# Altium PCB TheRealMainboardPCB.PcbDoc
Units mil, origin at the board's own origin, x right, y up, seen from the top; angles counter-clockwise.
Board outline 3740.16 x 3740.16 mil, 2 copper layers (Top Layer, Bottom Layer); 30 components, 40 nets, 162 pads, 83 vias.
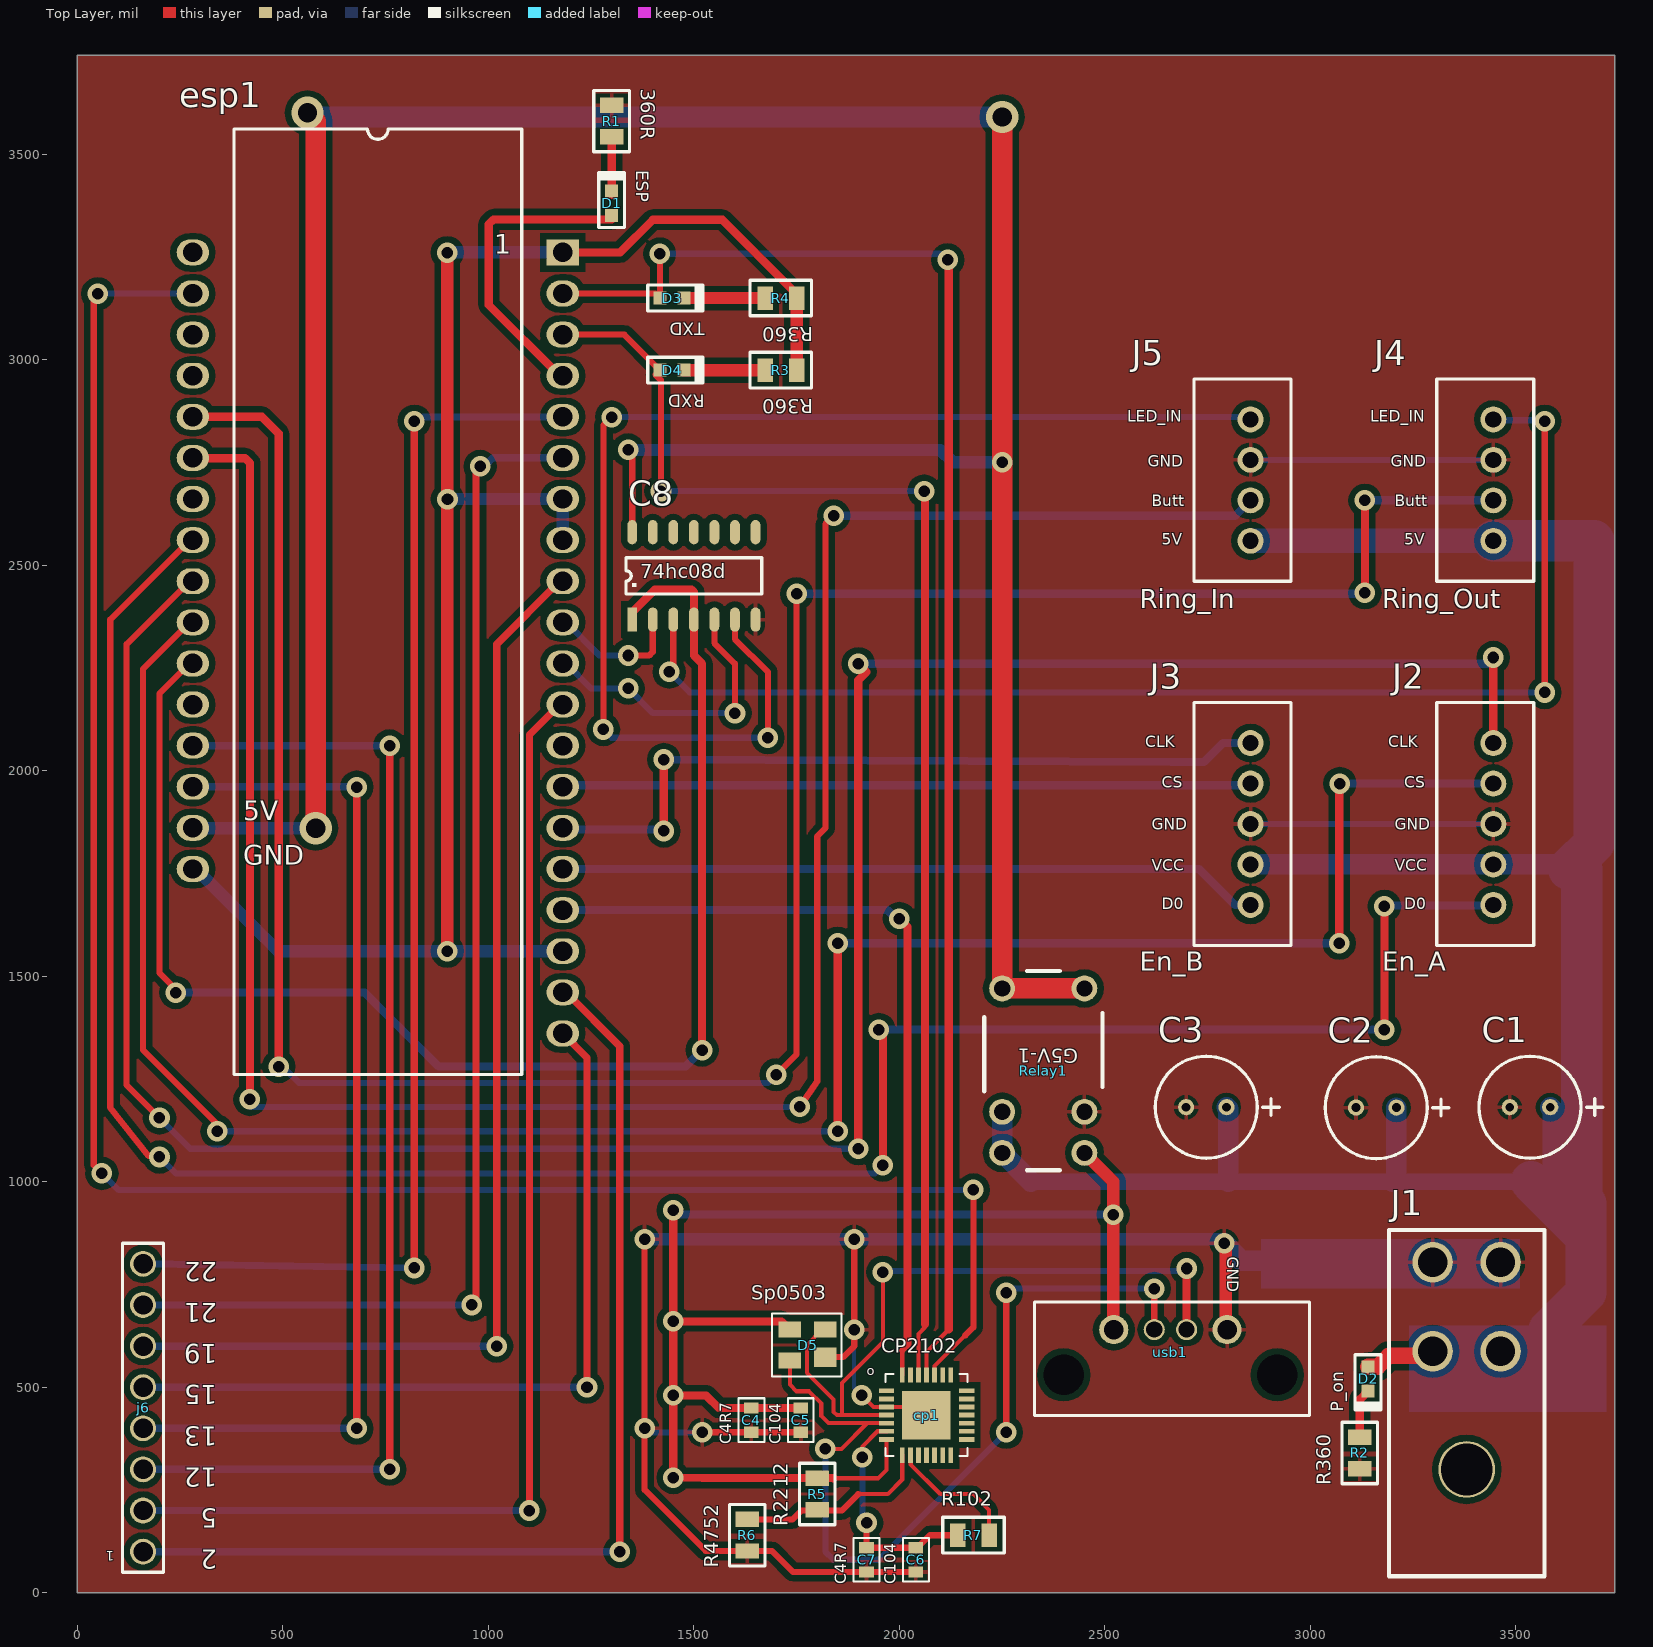
[diagram p0: Top Layer view]
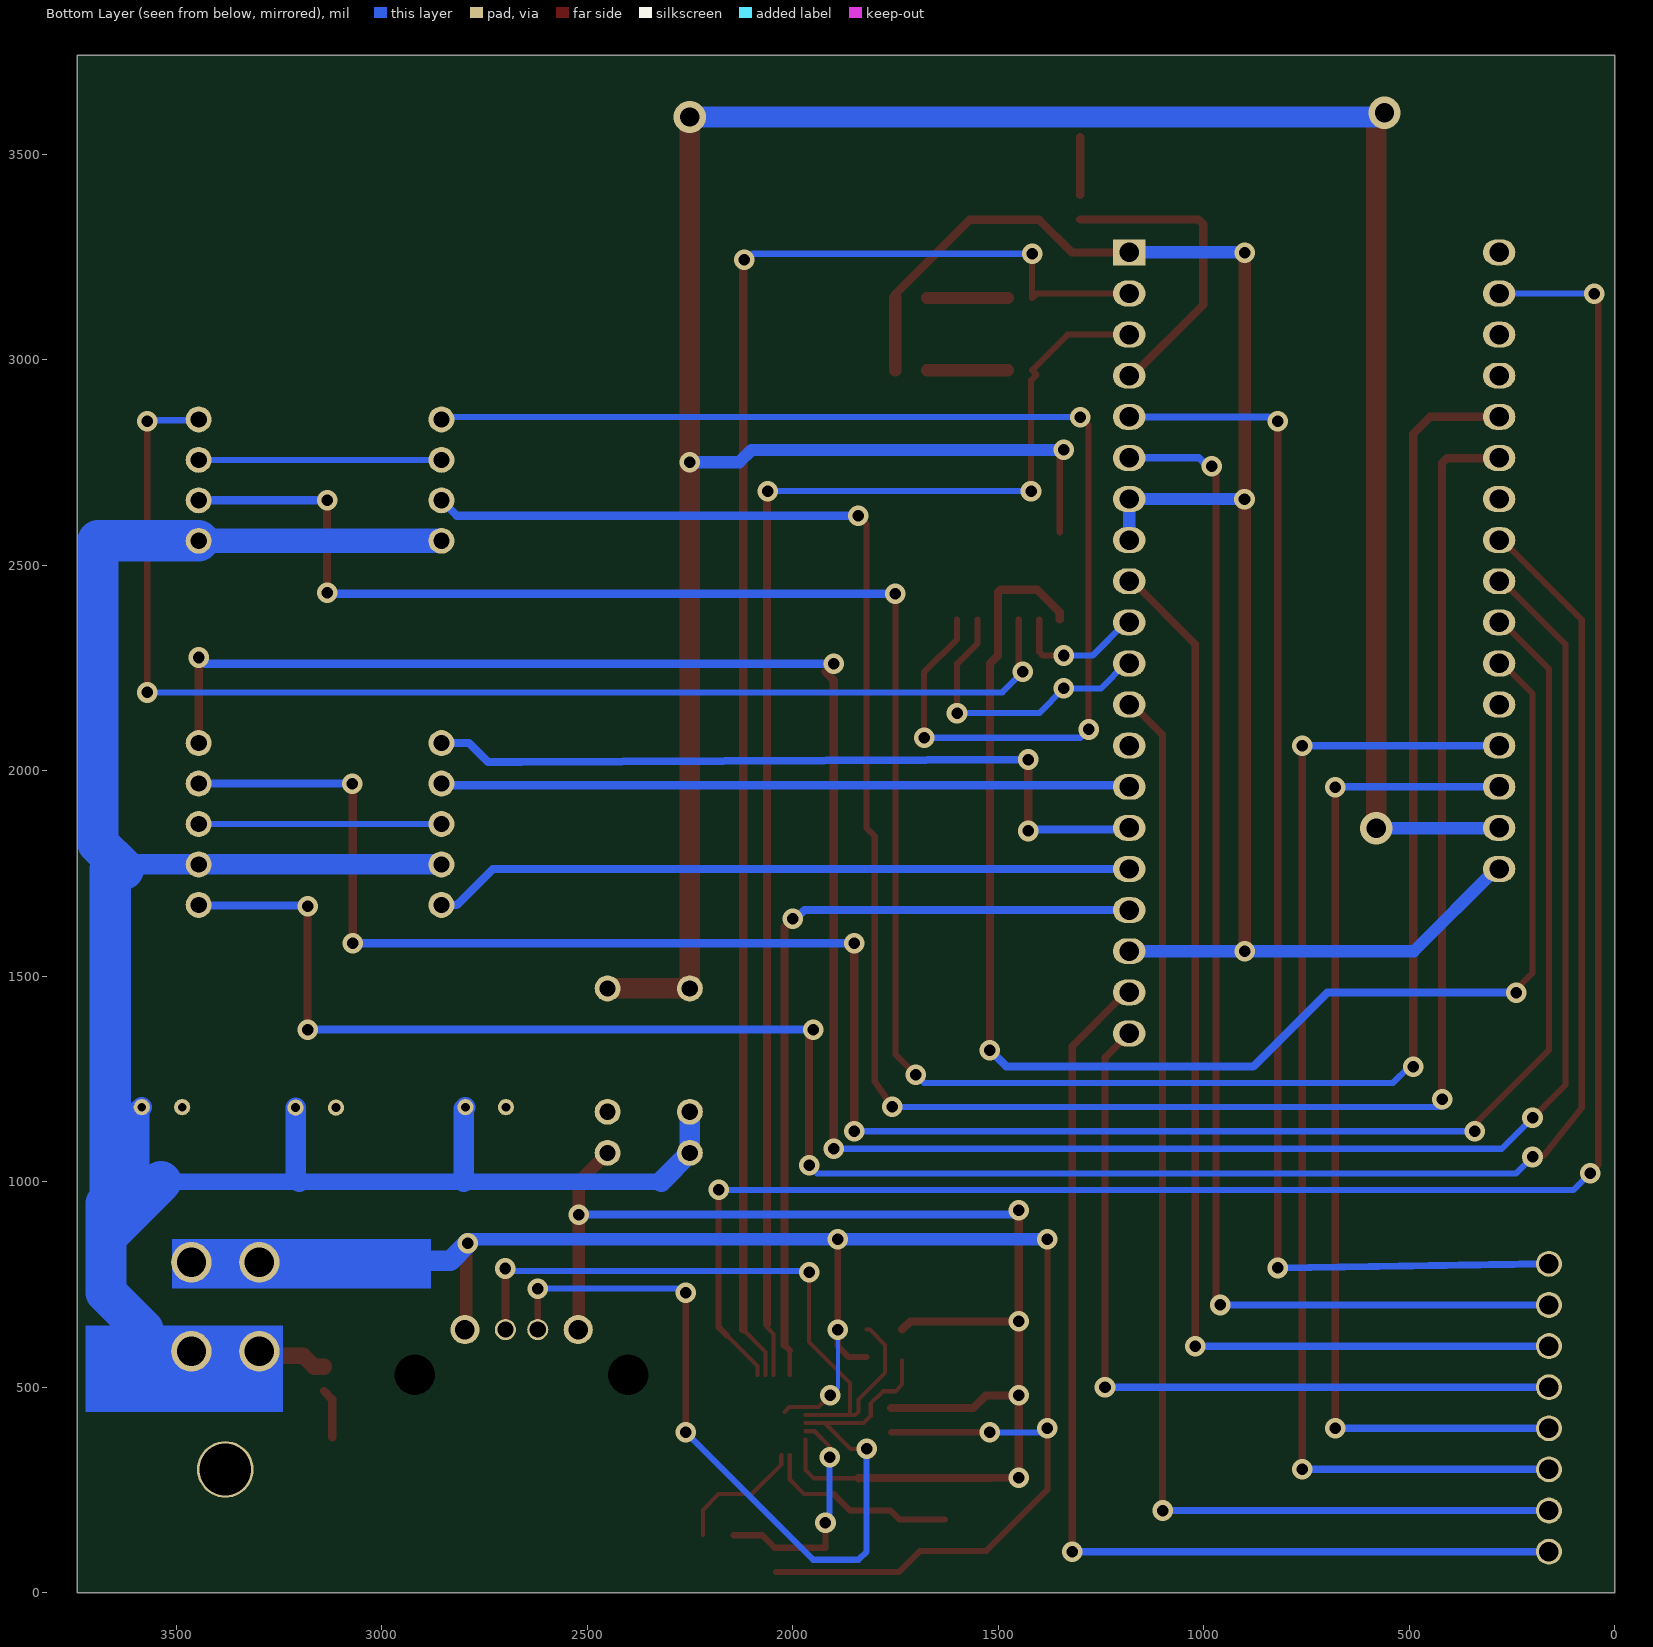
[diagram p1: Bottom Layer view, seen from below]
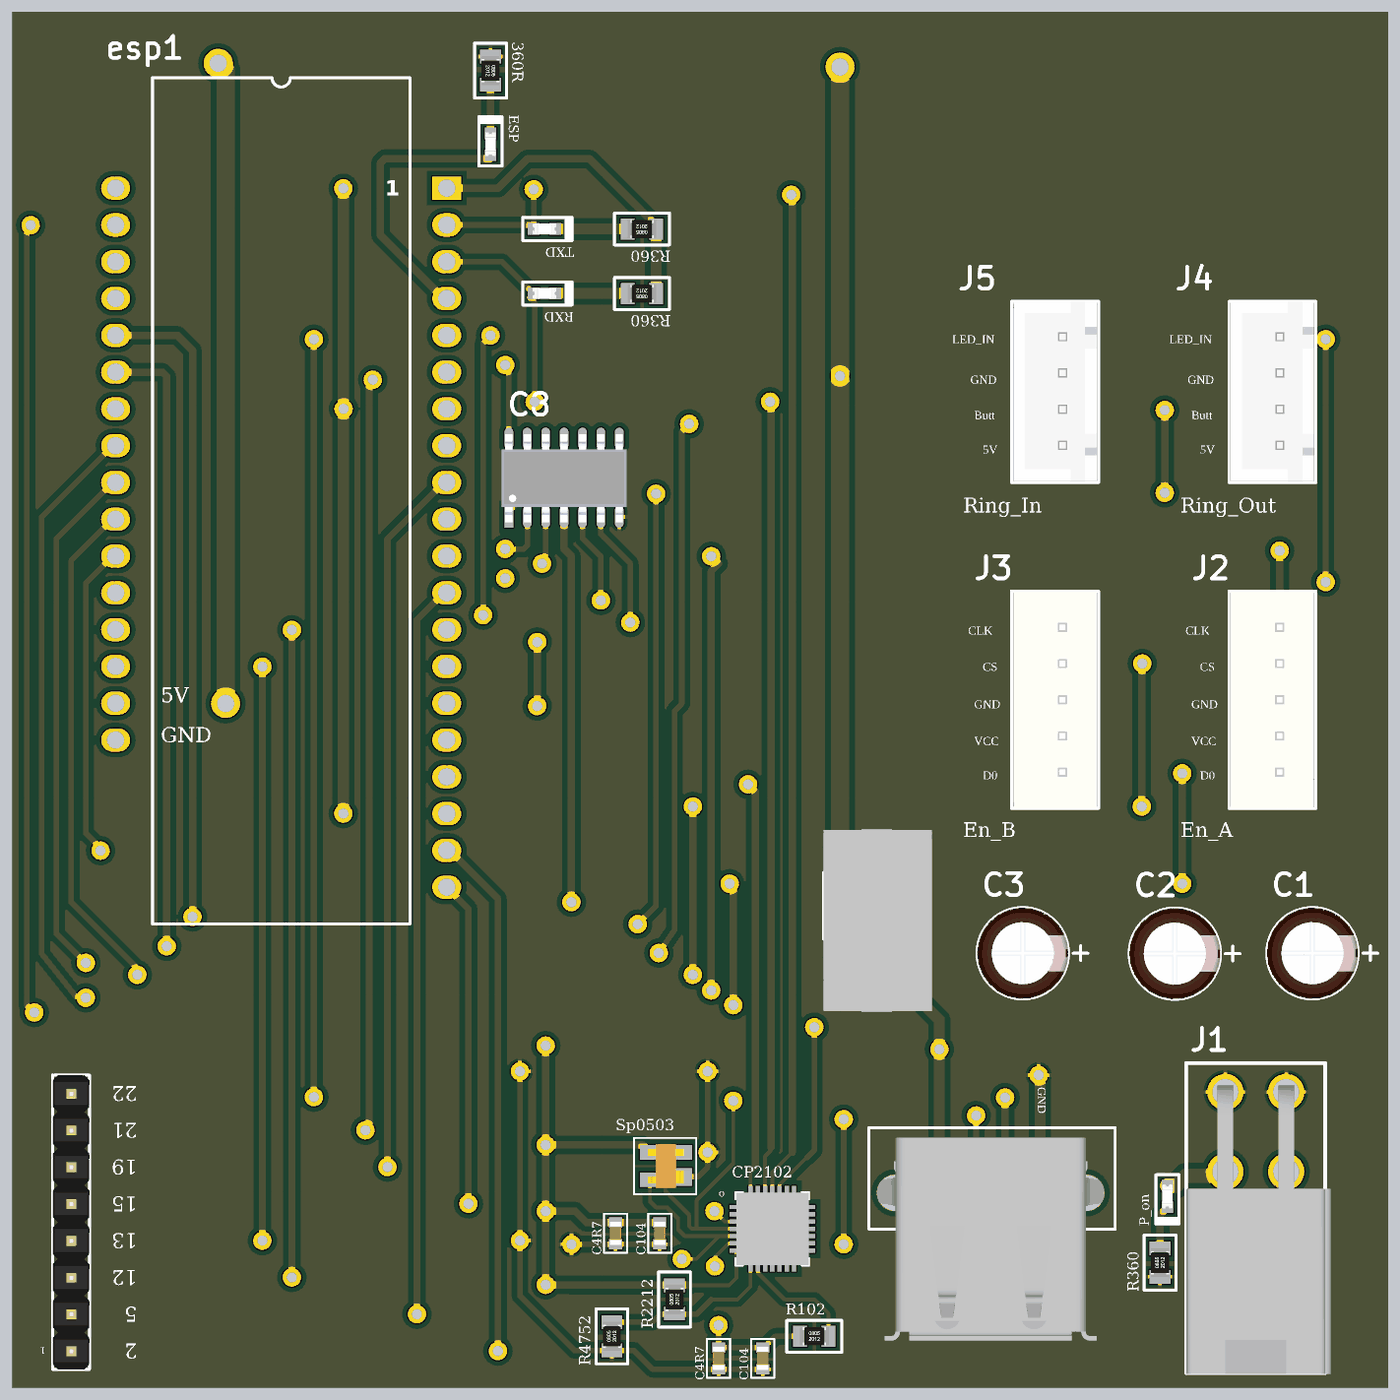
[diagram p2: 3D render of the assembled board from above, using the file's embedded part models]

## Layer stack, top to bottom
Top Solder: solder mask 0.4, Solder Resist, Dk 3.5
Top Layer: signal copper 1.4
Dielectric 1: dielectric 12.6, FR-4, Dk 4.8
Bottom Layer: signal copper 1.4
Bottom Solder: solder mask 0.4, Solder Resist, Dk 3.5

## Board outline
0,0 3740.16,0 3740.16,3740.16 0,3740.16

## Design rules (kind name [scope] priority, off if disabled: settings)
Clearance [All] p1: gap=15 ignorepadtopadclearanceinfootprint=FALSE except(5: Arc-THPad Arc-Text Arc-Hole Track-THPad Track-Text Track-Hole SMDPad-SMDPad SMDPad-THPad SMDPad-Via SMDPad-Text SMDPad-Hole THPad-THPad THPad-Via THPad-Text THPad-Hole Via-Via Via-Text Via-Hole Fill-Text Fill-Hole Poly-Text Poly-Hole Region-Text Region-Hole Text-Text Text-Hole; 7: Arc-SMDPad Track-SMDPad; 9: Arc-Arc Arc-Track Track-Track; 10: Arc-Via Track-Via)
HoleSize [All] p1: absolutevalues=TRUE maxlimit=196.85 minlimit=1 maxpercent=80.000 minpercent=20.000
MinimumSolderMaskSliver [All] p1: minsoldermaskwidth=0
PolygonConnect [All] p1: connectstyle=Relief reliefconductorwidth=10 reliefentries=4 polygonreliefangle="90 Angle" airgapwidth=10
RoutingVias [All] p1: holewidth=11.81 width=19.68 viastyle="Through Hole" minholewidth=11.81 minwidth=19.68 maxholewidth=47.24 maxwidth=78.74
SilkToSilkClearance [All] p1: silktosilkclearance=5
SilkToSolderMaskClearance [IsPad] p1: minsilkscreentomaskgap=5 clearancetoexposedcopper=TRUE
SolderMaskExpansion [All] p1: expansion=4
Width [All] p1: maxlimit=100 minlimit=5 preferedwidth=10
26 further rules are at their usual default settings.

## Components (designator, comment, footprint, x,y, rotation, side; value= is the part's Value field where it differs from the comment)
C1 "EEU-FM0J331" 2.5mmCapacitor 3534.09,1181.1 r0 top
C2 "EEU-FM0J331" 2.5mmCapacitor 3160,1180 r0 top
C3 "EEU-FM0J331" 2.5mmCapacitor 2746.69,1181.1 r0 top
C4 "C4R7" Capacitor0603 1640,420 r90 top
C5 "C104" Capacitor0603 1760,420 r90 top
C6 "C104" Capacitor0603 2040,80 r90 top
C7 "C4R7" Capacitor0603 1920,80 r90 top
C8 "74hc08d" SOP14(74hc08d) 1350,2367.4 r90 top
cp1 "CP2102N" CP2102N_QFN28 2065.94,432.13 r0 top
D1 "ESP" LED0603 1300,3380 r270 top
D2 "P_on" LED0603 3140,520 r90 top
D3 "TXD" LED0603 1446.85,3149.61 r180 top
D4 "RXD" LED0603 1446.85,2974.33 r180 top
D5 "SP0503BAHTG" "SP0503BAHTG - SOT143-4" 1820,573.07 r90 top
esp1 "processor" ESP_32_socket 1181.1,3260.63 r0 top
J1 "4.2mm 4pin 39300040" "4.2mm 4pos" 3462.68,803.94 r270 top
J2 "En_A" "XH 2.54 5 PIN" 3444.88,2066.93 r0 top
J3 "En_B" "XH 2.54 5 PIN" 2854.33,2066.93 r0 top
J4 "Ring_Out" "XH 2.54 4 PIN" 3444.88,2559.06 r0 top
J5 "Ring_In" "XH 2.54 4 PIN" 2854.33,2559.06 r0 top
j6 "1x8 dupont io pins" "1X8 DUPONT" 160,100 r180 top
R1 "360R" R0805 1300,3580 r270 top
R2 "R360" R0805 3120,340 r90 top
R3 "R360" R0805 1711.61,2974.33 r180 top
R4 "R360" R0805 1711.61,3149.61 r180 top
R5 "R2212" R0805 1800,240 r90 top
R6 "R4752" R0805 1630,140 r90 top
R7 "R102" R0805 2180,140 r0 top
Relay1 "Omron_G5v_dc5" G5v1_5vdc 2450,1070 r180 top
usb1 "usb_A_horizontal" HORIZONTAL_USB_A_MALE_SOCKET 2797.17,640 r270 top

## Footprints (in the part's own frame and the unit in brackets; to place one, negate y for a bottom-side part, rotate by r counter-clockwise, add the part's x,y. Pads: shape width x height; smd on the part's side, far side on the other; paste and mask are expansions set on the pad)
"1X8 DUPONT" [mm]
  round 1.6 hole 1.2: 1(0,0) 2(0,-2.54) 3(0,-5.08) 4(0,-7.62) 5(0,-10.16) 6(0,-12.7) 7(0,-15.24) 8(0,-17.78)
  silkscreen extent -1.27,-19.05 1.27,1.27, body extent -1.27,-19.05 1.27,1.27, height 9.2
2.5mmCapacitor [mm]
  round 1 hole 0.55: 1(-1.25,0) 2(1.25,0)
  silkscreen extent -3.15,-3.15 4.5,3.15, body extent -3.15,-3.15 3.15,3.15, height 11
"4.2mm 4pos" [mm]
  round 2.5 hole 1.8: 1(0,0) 2(0,-4.2) 3(5.5,-4.2) 4(5.5,0)
  round 3.5 hole 3.2: 88(12.8,-2.1)
  silkscreen extent -2,-6.9 19.4,2.7, body extent -0.47,-6.9 19.47,3.1, height 11.4
Capacitor0603 [mm]
  rect 0.7x0.9 smd: 1(-0.75,0) 2(0.75,0)
  silkscreen extent -1.35,-0.8 1.35,0.8, body extent -0.8,-0.4 0.8,0.4, height 0.9
CP2102N_QFN28 [mm]
  rect 0.95x0.3 smd: 1(-2.475,1.5) 2(-2.475,1) 3(-2.475,0.5) 4(-2.475,0) 5(-2.475,-0.5) 6(-2.475,-1) 7(-2.475,-1.5) 15(2.475,-1.5) 16(2.475,-1) 17(2.475,-0.5) 18(2.475,0) 19(2.475,0.5) 20(2.475,1) 21(2.475,1.5)
  rect 0.3x0.95 smd: 8(-1.5,-2.475) 9(-1,-2.475) 10(-0.5,-2.475) 11(0,-2.475) 12(0.5,-2.475) 13(1,-2.475) 14(1.5,-2.475) 22(1.5,2.475) 23(1,2.475) 24(0.5,2.475) 25(0,2.475) 26(-0.5,2.475) 27(-1,2.475) 28(-1.5,2.475)
  rect 3x3 smd: 29(-0.011,0.001)
  silkscreen extent -2.54,-2.54 2.54,2.54, body extent -2.5,-2.51 2.52,2.51, height 0.75
ESP_32_socket [mm]
  rect 2x1.6 hole 1.2: 1(0,0)
  oval 2x1.6 hole 1.2: 2(0,-2.54) 3(0,-5.08) 4(0,-7.62) 5(0,-10.16) 6(0,-12.7) 7(0,-15.24) 8(0,-17.78) 9(0,-20.32) 10(0,-22.86) 11(0,-25.4) 12(0,-27.94) 13(0,-30.48) 14(0,-33.02) 15(0,-35.56) 16(0,-38.1) 17(0,-40.64) 18(0,-43.18) 19(0,-45.72) 20(0,-48.26) 21(-22.86,0) 22(-22.86,-2.54) 23(-22.86,-5.08) 24(-22.86,-7.62) 25(-22.86,-10.16) 26(-22.86,-12.7) 27(-22.86,-15.24) 28(-22.86,-17.78) 29(-22.86,-20.32) 30(-22.86,-22.86) 31(-22.86,-25.4) 32(-22.86,-27.94) 33(-22.86,-30.48) 34(-22.86,-33.02) 35(-22.86,-35.56) 36(-22.86,-38.1)
  silkscreen extent -20.32,-50.8 -2.54,7.62
G5v1_5vdc [mm]
  round 1.6 hole 1: 1(5.08,-2.54) 2(0,-2.54) 3(0,-10.16) 3(5.08,-10.16) 4(0,0) 5(5.08,0)
  silkscreen extent -1.11,-11.23 6.19,1.07, body extent -1.28,-11.33 6.22,1.17, height 10
HORIZONTAL_USB_A_MALE_SOCKET [mm]
  round 1.8 hole 1.2: 1(0,0) 4(0,-7)
  round 1.3 hole 1: 2(0,-2.5) 3(0,-4.5)
  round 0 hole 2.5: 5(2.8,-10.1) 8(2.8,3.1)
  silkscreen extent -1.7,-11.9 5.3,5.1, body extent -1,-11.62 13,4.62, height 7.67
LED0603 [mm]
  rect 0.8x0.8 smd: 1(-0.75,0) 2(0.75,0)
  silkscreen extent -1.9,-0.8 1.5,0.8, body extent -0.83,-0.37 0.83,0.36, height 0.68
R0805 [mm]
  rect 0.95x1.45 smd: 1(-0.975,0) 2(0.975,0)
  silkscreen extent -1.9,-1.1 1.9,1.1, body extent -1,-0.62 1,0.63, height 0.46
SOP14(74hc08d) [mm]
  rect 1.5x0.6 smd: 1(0,0)
  oval 1.5x0.6 smd: 2(0,-1.27) 3(0,-2.54) 4(0,-3.81) 5(0,-5.08) 6(0,-6.35) 7(0,-7.62) 8(5.4,-7.62) 9(5.4,-6.35) 10(5.4,-5.08) 11(5.4,-3.81) 12(5.4,-2.54) 13(5.4,-1.27) 14(5.4,0)
  silkscreen extent 1.58,-8 3.82,0.38, body extent -0.38,-8.13 5.72,0.51, height 1.75
"SP0503BAHTG - SOT143-4" [mm]
  rect 1.2x1.4 smd: 1(0,0)
  rect 1x1.4 smd: 2(1.7,0) 3(-0.2,2.2) 4(1.7,2.2)
  silkscreen extent -1.2,-1 2.7,3.3, body extent -0.75,-0.15 2.25,2.35, height 1.11
"XH 2.54 4 PIN" [mm]
  round 1.6 hole 1: 1(0,0) 2(0,2.5) 3(0,5) 4(0,7.5)
  silkscreen extent -3.5,-2.5 2.5,10, body extent -3.38,-2.39 2.37,10.01, height 7
"XH 2.54 5 PIN" [mm]
  round 1.6 hole 1: 1(0,-10) 2(0,-7.5) 3(0,-5) 4(0,-2.5) 5(0,0)
  silkscreen extent -3.5,-12.5 2.5,2.5, body extent -3.38,-12.45 2.38,2.45, height 7

## Part data
C1 C2 C3: "Cap 330 uF;  Tol 20%;  Vol-Rtg 6.3 VDC;  Radial;  6.3x11.2;  Bulk", Capacitance=330uF, Case/Package=Radial, Dielectric Material=Aluminium, ESR (Equivalent Series Resistance)=130mR, Leakage Current=10nA, Manufacturer 1=Panasonic, Max Operating Temperature=105°C, Min Operating Temperature=-40°C, Package Quantity=200, Ripple Current=455mA, Supplier Part Number 1=P12918-ND, Tolerance=20%, Voltage=6.3V, Category="Aluminum Electrolytic Capacitors", ComponentLink1Description=https://datasheet.ciiva.com/11778/0900766b805f3abe-11778876.pdf?src-supplier=RSComponents, ComponentLink1URL=https://datasheet.ciiva.com/11778/0900766b805f3abe-11778876.pdf?src-supplier=RSComponents, ComponentLink2Description=https://datasheet.ciiva.com/92/aba0000ce108-92408.pdf?src-supplier=Digi-Key, ComponentLink2URL=https://datasheet.ciiva.com/92/aba0000ce108-92408.pdf?src-supplier=Digi-Key, ComponentLink3Description=https://datasheet.ciiva.com/30086/aba0000ce108-30086253.pdf?src-supplier=Onlinecomponents.com, ComponentLink3URL=https://datasheet.ciiva.com/30086/aba0000ce108-30086253.pdf?src-supplier=Onlinecomponents.com, ComponentLink4Description=https://datasheet.ciiva.com/16432/aba0000ce108-16432949.pdf?src-supplier=Future+Electronics, ComponentLink4URL=https://datasheet.ciiva.com/16432/aba0000ce108-16432949.pdf?src-supplier=Future+Electronics, ComponentLink5Description=https://datasheet.ciiva.com/46441/26036-46441017.pdf?src-supplier=Element14, ComponentLink5URL=https://datasheet.ciiva.com/46441/26036-46441017.pdf?src-supplier=Element14, ComponentLink6Description=https://datasheet.ciiva.com/14608/70068540-14608622.pdf?src-supplier=Allied+Electronics, ComponentLink6URL=https://datasheet.ciiva.com/14608/70068540-14608622.pdf?src-supplier=Allied+Electronics, Diameter=6mm, Height=11.2mm, Height - Seated (Max)=0.5inch, Impedance=130mR, Lead Diameter=0.5mm, Lead Free="Lead Free", Lead Length=17mm, Lead Pitch=2.5mm, Length=11.2mm, Life (Hours)=2000Hour, Manufacturer Part Number 1=EEU-FM0J331, Mount="Through Hole,PCB", Number of Pins=2, Outside Diameter=6mm, Packaging=Bulk, Pricing 1="1=0.30000, 10=0.21200, 50=0.14800, 100=0.12690, 500=0.09518, 1000=0.08037, 2500=0.07614, 5000=0.07191 (USD)", Radiation Hardening=No, REACH SVHC="No SVHC", Ripple Current (AC)=455mA, RoHS=Yes, Stock 1=15455, Supplier 1=Digi-Key, Termination=Radial, Voltage Rating=6.3V, Voltage Rating (DC)=6.3V
C4: library part capacitor0603, "Cap Ceramic 4.7uF 6.3V X5R 20% Pad SMD 0402 85C T/R", Capacitance=4.7uF, Dielectric=X5R, Manufacturer 1=Murata, Manufacturer Part Number 1=GRM155R60J475ME87J, Supplier Part Number 1=490-18211-1-ND, Tolerance=20%, Voltage Rating (DC)=6.3V, Category="Ceramic Capacitors", ComponentLink1Description=https://search.murata.co.jp/Ceramy/image/img/A01X/G101/ENG/GRM155R60J475ME87-01.pdf?src-supplier=Digi-Key, ComponentLink1URL=https://search.murata.co.jp/Ceramy/image/img/A01X/G101/ENG/GRM155R60J475ME87-01.pdf?src-supplier=Digi-Key, Length=1mm, Pricing 1="1=0.16000, 10=0.11100, 50=0.06280, 100=0.05210, 500=0.03654, 1000=0.03025, 2500=0.02815, 5000=0.02575 (USD)", RoHS=No, Stock 1=206568, Supplier 1=Digi-Key, Thickness=500um, Width=500um
C5: library part capacitor0603, "0.1uf", Capacitance=4.7uF, Dielectric=X5R, Manufacturer 1=Murata, Manufacturer Part Number 1=GRM155R60J475ME87J, Supplier Part Number 1=490-18211-1-ND, Tolerance=20%, Voltage Rating (DC)=6.3V, Category="Ceramic Capacitors", ComponentLink1Description=https://search.murata.co.jp/Ceramy/image/img/A01X/G101/ENG/GRM155R60J475ME87-01.pdf?src-supplier=Digi-Key, ComponentLink1URL=https://search.murata.co.jp/Ceramy/image/img/A01X/G101/ENG/GRM155R60J475ME87-01.pdf?src-supplier=Digi-Key, Length=1mm, Pricing 1="1=0.16000, 10=0.11100, 50=0.06280, 100=0.05210, 500=0.03654, 1000=0.03025, 2500=0.02815, 5000=0.02575 (USD)", RoHS=No, Stock 1=206568, Supplier 1=Digi-Key, Thickness=500um, Width=500um
C6: library part capacitor0603, "4.7", Capacitance=4.7uF, Dielectric=X5R, Manufacturer 1=Murata, Manufacturer Part Number 1=GRM155R60J475ME87J, Supplier Part Number 1=490-18211-1-ND, Tolerance=20%, Voltage Rating (DC)=6.3V, Category="Ceramic Capacitors", ComponentLink1Description=https://search.murata.co.jp/Ceramy/image/img/A01X/G101/ENG/GRM155R60J475ME87-01.pdf?src-supplier=Digi-Key, ComponentLink1URL=https://search.murata.co.jp/Ceramy/image/img/A01X/G101/ENG/GRM155R60J475ME87-01.pdf?src-supplier=Digi-Key, Length=1mm, Pricing 1="1=0.16000, 10=0.11100, 50=0.06280, 100=0.05210, 500=0.03654, 1000=0.03025, 2500=0.02815, 5000=0.02575 (USD)", RoHS=No, Stock 1=206568, Supplier 1=Digi-Key, Thickness=500um, Width=500um
C7: library part capacitor0603, "0.1", Capacitance=4.7uF, Dielectric=X5R, Manufacturer 1=Murata, Manufacturer Part Number 1=GRM155R60J475ME87J, Supplier Part Number 1=490-18211-1-ND, Tolerance=20%, Voltage Rating (DC)=6.3V, Category="Ceramic Capacitors", ComponentLink1Description=https://search.murata.co.jp/Ceramy/image/img/A01X/G101/ENG/GRM155R60J475ME87-01.pdf?src-supplier=Digi-Key, ComponentLink1URL=https://search.murata.co.jp/Ceramy/image/img/A01X/G101/ENG/GRM155R60J475ME87-01.pdf?src-supplier=Digi-Key, Length=1mm, Pricing 1="1=0.16000, 10=0.11100, 50=0.06280, 100=0.05210, 500=0.03654, 1000=0.03025, 2500=0.02815, 5000=0.02575 (USD)", RoHS=No, Stock 1=206568, Supplier 1=Digi-Key, Thickness=500um, Width=500um
C8: library part 74HC08, ComponentLink1Description="4 2-input and gate", ComponentLink1URL=https://pdf1.alldatasheet.com/datasheet-pdf/view/646498/PHILIPS/74HC08D.html
cp1: library part CP2102N-A02-GQFN28R, "Full Speed USB to UART Bridge USB 2.0 3.3V T/R Automotive 28-Pin QFN EP", Manufacturer 1="Silicon Labs", Supplier Part Number 1=336-5890-1-ND, Manufacturer Part Number 1=CP2102N-A02-GQFN28R, Pricing 1="1=1.40000, 25=1.35160, 100=1.29950 (USD)", RoHS=No, Stock 1=1682, Supplier 1=Digi-Key
D1 D2 D3 D4: library part LTST-C190TBKT, "LED BLUE CLEAR CHIP SMD", Case/Package=0603, Case Code (Metric)=1608, Color=Blue, Forward Current=20mA, Forward Voltage=3.8V, Lens Color=Colorless, Manufacturer 1="Vishay Lite-On", Max Operating Temperature=80°C, Min Operating Temperature=-20°C, Package Quantity=1, Power Dissipation=76mW, Reverse Voltage=5V, Case Code (Imperial)=0603, Category=LEDs, ComponentLink1Description=https://datasheet.ciiva.com/16353/lite-on20ltst-c190tbkt-16353409.pdf?src-supplier=Future+Electronics, ComponentLink1URL=https://datasheet.ciiva.com/16353/lite-on20ltst-c190tbkt-16353409.pdf?src-supplier=Future+Electronics, ComponentLink2Description=https://datasheet.ciiva.com/15117/getdatasheetpartid-131310-15117667.pdf?src-supplier=Verical, ComponentLink2URL=https://datasheet.ciiva.com/15117/getdatasheetpartid-131310-15117667.pdf?src-supplier=Verical, ComponentLink3Description=https://datasheet.ciiva.com/2110/ltst-c190tbkt-2110473.pdf?src-supplier=Digi-Key, ComponentLink3URL=https://datasheet.ciiva.com/2110/ltst-c190tbkt-2110473.pdf?src-supplier=Digi-Key, ComponentLink4Description=https://datasheet.ciiva.com/12400/lite-on-ltst-c190tbkt-187381-12400873.pdf?src-supplier=Mouser, ComponentLink4URL=https://datasheet.ciiva.com/12400/lite-on-ltst-c190tbkt-187381-12400873.pdf?src-supplier=Mouser, ComponentLink5Description=https://datasheet.ciiva.com/11774/0900766b80dc02ab-11774378.pdf?src-supplier=RSComponents, ComponentLink5URL=https://datasheet.ciiva.com/11774/0900766b80dc02ab-11774378.pdf?src-supplier=RSComponents, ComponentLink6Description=https://datasheet.ciiva.com/26913/ltst-c190tbkt-26913716.pdf?src-supplier=IIIC, ComponentLink6URL=https://datasheet.ciiva.com/26913/ltst-c190tbkt-26913716.pdf?src-supplier=IIIC, ComponentLink7Description=https://datasheet.ciiva.com/2110/s-110-ltst-c190tbkt0630-2110475.pdf?src-supplier=Digi-Key, ComponentLink7URL=https://datasheet.ciiva.com/2110/s-110-ltst-c190tbkt0630-2110475.pdf?src-supplier=Digi-Key, ComponentLink8Description=¾ï¦â, ComponentLink8URL=https://www.digikey.tw/product-detail/zh/lite-on-inc/LTST-C191KFKT/160-1445-1-ND/386832, Depth=0.8mm, Dominant Wavelength=475nm, Height=0.8mm, Illumination Color=Blue, Lead Free="Lead Free", Length=1.6mm, Lens Style=Diffused,Colorless,Clear,Rectangular, Lens Transparency=Clear, Luminous Intensity=180mcd, Manufacturer Part Number 1=LTST-C190TBKT, Mount="Surface Mount", Number of Elements=1, Number of LEDs=1, Number of Pins=2, Packaging="Tape and Reel", Pricing 1="1=0.50000, 10=0.35600, 100=0.15840, 500=0.11088, 1000=0.09108 (USD)", Radiation Hardening=No, RoHS=Yes, Stock 1=76203, Supplier 1=Digi-Key, Test Current=20mA, Viewing Angle=130°, Wavelength=468nm, Width=0.8mm
D5: "ESD Suppressor TVS 5.5V 4-Pin(3+Tab) SOT-143 T/R", Breakdown Voltage=5.5V, Capacitance=30pF, Case/Package=SOT-143, Clamping Voltage=8.5V, Leakage Current=100nA, Manufacturer 1=Littelfuse, Max Operating Temperature=85°C, Max Power Dissipation=225mW, Min Operating Temperature=-40°C, Power Line Protection=No, Resistor Type=Zener, Supplier Part Number 1=F2715CT-ND, Voltage Rating (DC)=5V, Category=Diodes, ComponentLink1Description=https://datasheet.ciiva.com/15143/getdatasheetpartid-116020-15143550.pdf?src-supplier=Verical, ComponentLink1URL=https://datasheet.ciiva.com/15143/getdatasheetpartid-116020-15143550.pdf?src-supplier=Verical, ComponentLink2Description=https://datasheet.ciiva.com/332/sp05xxba-332550.pdf?src-supplier=Digi-Key, ComponentLink2URL=https://datasheet.ciiva.com/332/sp05xxba-332550.pdf?src-supplier=Digi-Key, ComponentLink3Description=https://datasheet.ciiva.com/8062/littefuse-spa-sp050x-8062422.pdf?src-supplier=Element14, ComponentLink3URL=https://datasheet.ciiva.com/8062/littefuse-spa-sp050x-8062422.pdf?src-supplier=Element14, ComponentLink4Description=https://datasheet.ciiva.com/22697/1911798-22697942.pdf?src-supplier=Element14, ComponentLink4URL=https://datasheet.ciiva.com/22697/1911798-22697942.pdf?src-supplier=Element14, ComponentLink5Description=https://datasheet.ciiva.com/332/sp05xxba-332551.pdf?src-supplier=Digi-Key, ComponentLink5URL=https://datasheet.ciiva.com/332/sp05xxba-332551.pdf?src-supplier=Digi-Key, ComponentLink6Description=https://datasheet.ciiva.com/16449/sp05xxba-16449463.pdf?src-supplier=Future+Electronics, ComponentLink6URL=https://datasheet.ciiva.com/16449/sp05xxba-16449463.pdf?src-supplier=Future+Electronics, ComponentLink7Description=https://datasheet.ciiva.com/332/sp05xxba-332552.pdf?src-supplier=Digi-Key, ComponentLink7URL=https://datasheet.ciiva.com/332/sp05xxba-332552.pdf?src-supplier=Digi-Key, ComponentLink8Description=https://datasheet.ciiva.com/4509/sp05x-leadfree-4509162.pdf?src-supplier=Mouser, ComponentLink8URL=https://datasheet.ciiva.com/4509/sp05x-leadfree-4509162.pdf?src-supplier=Mouser, ComponentLink9Description=https://datasheet.ciiva.com/7650/526672-7650894.pdf?src-supplier=Element14, ComponentLink9URL=https://datasheet.ciiva.com/7650/526672-7650894.pdf?src-supplier=Element14, Depth=1.4mm, Diode Type=Avalanche, Direction=Unidirectional, Element Configuration="Common Anode", ESD Protection=Yes, Height=1.05mm, Lead Free="Lead Free", Length=3.04mm, Manufacturer Part Number 1=SP0503BAHTG, Max Reverse Leakage Current=100nA, Mount="Surface Mount", Number of Channels=3, Number of Elements=3, Number of Pins=4, Number of Unidirectional Channels=3, Operating Supply Voltage=5.5V, Packaging="Tape and Reel", Peak Pulse Power=225mW, Polarity=Bidirectional,Unidirectional, Power Dissipation=225mW, Pricing 1="1=0.80000, 10=0.66000, 100=0.51120, 500=0.38340, 1000=0.30885 (USD)", Radiation Hardening=No, REACH SVHC="No SVHC", Reverse Standoff Voltage=5.5V, RoHS=Yes, Stock 1=63906, Supplier 1=Digi-Key, Termination=SMD/SMT, Width=1.4mm, Working Voltage=5.5V
esp1: library part ESP_32_lolin
J1: "for neopixels array", Color=Natural, Contact Resistance=10mR, Flammability Rating="UL94 V-2", Manufacturer 1=Molex, Manufacturer Part Number 1=39-29-1048, Max Operating Temperature=105°C, Min Operating Temperature=-40°C, Supplier Part Number 1=WM3901-ND, Category="Headers and Wire Housings", ComponentLink7Description=realdatasheet, ComponentLink7URL=https://www.molex.com/pdm_docs/sd/039300040_sd.pdf, Connector Type="Header,Male Pin", Contact Material=Brass, Contact Plating=Tin,Copper, Contact Shape=Square, Depth=19.4mm, Fastening Type=Ramp, Gender=Male, Housing Color=Natural, Housing Material=Nylon, Insulation Color=Natural, Insulation Material=Nylon, Length=19.6mm, Mount="Through Hole", Number of Contacts=4, Number of Ports=1, Number of Positions=4, Number of Rows=2, Number of Terminals/Pins=4, Orientation="Right Angle", Packaging=Bulk, Pitch=4.2mm, Pricing 1="1=0.89000, 10=0.78000, 100=0.67300, 500=0.55062, 1000=0.48944, 5000=0.42826, 10000=0.40685 (USD)", RoHS=Yes, Row Spacing=0.165inch, Stock 1=1264, Supplier 1=Digi-Key, Termination=Solder
J2 J3: library part Abs_encoder_pins, ComponentLink1Description=datasheet, ComponentLink1URL=http://www.jst-mfg.com/product/pdf/eng/eXH.pdf
J4 J5: library part To_rings_connector
R1: library part CRCW0805360RFKEA, "Res Thick Film 0805 360 Ohm 1% 0.125W(1/8W) ±100ppm/C Molded SMD Automotive Paper T/R", Case/Package=0805, Case Code (Metric)=2012, Manufacturer 1=Vishay, Max Operating Temperature=155°C, Max Power Dissipation=125mW, Min Operating Temperature=-55°C, Package Quantity=10, Supplier Part Number 1=541-360CCT-ND, Temperature Coefficient=100ppm/°C, Tolerance=1%, Voltage Rating=150V, Case Code (Imperial)=0805, Category="Chip SMD Resistors", ComponentLink1Description=https://datasheet.ciiva.com/2467/dcrcwe3-2467773.pdf?src-supplier=Digi-Key, ComponentLink1URL=https://datasheet.ciiva.com/2467/dcrcwe3-2467773.pdf?src-supplier=Digi-Key, Composition="Thick Film", Contact Plating=Tin, Depth=1.25mm, Features="Automotive AEC-Q200", Height=0.45mm, Lead Free="Lead Free", Length=2mm, Manufacturer Part Number 1=CRCW0805360RFKEA, Military Standard=Not, Number of Pins=2, Number of Terminals=2, Number of Terminations=2, Packaging="Tape and Reel", Power Rating=125mW, Pricing 1="1=0.10000, 10=0.06000, 100=0.02450, 1000=0.01102, 2500=0.00957 (USD)", Radiation Hardening=No, REACH SVHC=Unknown, Resistance=360R, RoHS=Yes, Stock 1=25005, Supplier 1=Digi-Key, Termination=SMD/SMT, Voltage Rating (DC)=150V, Weight=0.000194oz, Width=0.049inch
R2 R3 R4: library part CRCW0805360RFKEA, "Res Thick Film 0805 360 Ohm 1% 0.125W(1/8W) ±100ppm/C Molded SMD Automotive Paper T/R", Case/Package=0805, Case Code (Metric)=2012, Manufacturer 1=Vishay, Max Operating Temperature=155°C, Max Power Dissipation=125mW, Min Operating Temperature=-55°C, Package Quantity=10, Resistance=360R, Supplier Part Number 1=541-360CCT-ND, Temperature Coefficient=100ppm/°C, Tolerance=1%, Voltage Rating=150V, Case Code (Imperial)=0805, Category="Chip SMD Resistors", ComponentLink1Description=https://datasheet.ciiva.com/2467/dcrcwe3-2467773.pdf?src-supplier=Digi-Key, ComponentLink1URL=https://datasheet.ciiva.com/2467/dcrcwe3-2467773.pdf?src-supplier=Digi-Key, Composition="Thick Film", Contact Plating=Tin, Depth=1.25mm, Features="Automotive AEC-Q200", Height=0.45mm, Lead Free="Lead Free", Length=2mm, Manufacturer Part Number 1=CRCW0805360RFKEA, Military Standard=Not, Number of Pins=2, Number of Terminals=2, Number of Terminations=2, Packaging="Tape and Reel", Power Rating=125mW, Pricing 1="1=0.10000, 10=0.06000, 100=0.02450, 1000=0.01102, 2500=0.00957 (USD)", Radiation Hardening=No, REACH SVHC=Unknown, RoHS=Yes, Stock 1=25005, Supplier 1=Digi-Key, Termination=SMD/SMT, Voltage Rating (DC)=150V, Weight=0.000194oz, Width=0.049inch
R5 R6: library part resistor(CRCW0805360RFKEA, "Res Thick Film 0805 360 Ohm 1% 0.125W(1/8W) ±100ppm/C Molded SMD Automotive Paper T/R", Case/Package=0805, Case Code (Metric)=2012, Manufacturer 1=Vishay, Manufacturer Part Number 1=CRCW0805360RFKEA, Max Operating Temperature=155°C, Max Power Dissipation=125mW, Min Operating Temperature=-55°C, Package Quantity=10, Resistance=360R, Supplier Part Number 1=541-360CCT-ND, Temperature Coefficient=100ppm/°C, Tolerance=1%, Voltage Rating=150V, Case Code (Imperial)=0805, Category="Chip SMD Resistors", ComponentLink1Description=https://datasheet.ciiva.com/2467/dcrcwe3-2467773.pdf?src-supplier=Digi-Key, ComponentLink1URL=https://datasheet.ciiva.com/2467/dcrcwe3-2467773.pdf?src-supplier=Digi-Key, Composition="Thick Film", Contact Plating=Tin, Depth=1.25mm, Features="Automotive AEC-Q200", Height=0.45mm, Lead Free="Lead Free", Length=2mm, Military Standard=Not, Number of Pins=2, Number of Terminals=2, Number of Terminations=2, Packaging="Tape and Reel", Power Rating=125mW, Pricing 1="1=0.10000, 10=0.06000, 100=0.02450, 1000=0.01102, 2500=0.00957 (USD)", Radiation Hardening=No, REACH SVHC=Unknown, RoHS=Yes, Stock 1=25005, Supplier 1=Digi-Key, Termination=SMD/SMT, Voltage Rating (DC)=150V, Weight=0.000194oz, Width=0.049inch
R7: library part resistor(CRCW0805360RFKEA, "1Kohms", Case/Package=0805, Case Code (Metric)=2012, Manufacturer 1=Vishay, Manufacturer Part Number 1=CRCW0805360RFKEA, Max Operating Temperature=155°C, Max Power Dissipation=125mW, Min Operating Temperature=-55°C, Package Quantity=10, Resistance=360R, Supplier Part Number 1=541-360CCT-ND, Temperature Coefficient=100ppm/°C, Tolerance=1%, Voltage Rating=150V, Case Code (Imperial)=0805, Category="Chip SMD Resistors", ComponentLink1Description=https://datasheet.ciiva.com/2467/dcrcwe3-2467773.pdf?src-supplier=Digi-Key, ComponentLink1URL=https://datasheet.ciiva.com/2467/dcrcwe3-2467773.pdf?src-supplier=Digi-Key, Composition="Thick Film", Contact Plating=Tin, Depth=1.25mm, Features="Automotive AEC-Q200", Height=0.45mm, Lead Free="Lead Free", Length=2mm, Military Standard=Not, Number of Pins=2, Number of Terminals=2, Number of Terminations=2, Packaging="Tape and Reel", Power Rating=125mW, Pricing 1="1=0.10000, 10=0.06000, 100=0.02450, 1000=0.01102, 2500=0.00957 (USD)", Radiation Hardening=No, REACH SVHC=Unknown, RoHS=Yes, Stock 1=25005, Supplier 1=Digi-Key, Termination=SMD/SMT, Voltage Rating (DC)=150V, Weight=0.000194oz, Width=0.049inch
usb1: "4 Position Single Port Socket Right Angle Type A Through Hole USB", Color=Black, Contact Current Rating=1A, Flammability Rating="UL94 V-0", Insulation Resistance=1GR, Manufacturer 1="TE Connectivity", Manufacturer Part Number 1=292303-1, Max Operating Temperature=185°C, Min Operating Temperature=-67°C, Package Quantity=30, Supplier Part Number 1=A31726-ND, Voltage Rating (AC)=30V, Approvals=UL, Category="Audio / Video Connectors", Circuit Application=Signal, ComponentLink1Description=https://datasheet.ciiva.com/851/eng-cd-292303-e9-851601.pdf?src-supplier=Farnell, ComponentLink1URL=https://datasheet.ciiva.com/851/eng-cd-292303-e9-851601.pdf?src-supplier=Farnell, ComponentLink2Description=https://datasheet.ciiva.com/1099/1653030-1099765.pdf?src-supplier=Newark, ComponentLink2URL=https://datasheet.ciiva.com/1099/1653030-1099765.pdf?src-supplier=Newark, ComponentLink3Description=https://datasheet.ciiva.com/1098/eng-cd-292303-e9-1098298.pdf?src-supplier=Element14, ComponentLink3URL=https://datasheet.ciiva.com/1098/eng-cd-292303-e9-1098298.pdf?src-supplier=Element14, ComponentLink4Description=https://datasheet.ciiva.com/11731/0900766b806d08c4-11731322.pdf?src-supplier=RSComponents, ComponentLink4URL=https://datasheet.ciiva.com/11731/0900766b806d08c4-11731322.pdf?src-supplier=RSComponents, ComponentLink5Description=https://datasheet.ciiva.com/14103/04270708-14103420.pdf?src-supplier=Distrelec, ComponentLink5URL=https://datasheet.ciiva.com/14103/04270708-14103420.pdf?src-supplier=Distrelec, ComponentLink6Description=https://datasheet.ciiva.com/19454/921651-19454494.pdf?src-supplier=Jameco, ComponentLink6URL=https://datasheet.ciiva.com/19454/921651-19454494.pdf?src-supplier=Jameco, ComponentLink7Description=https://datasheet.ciiva.com/16308/eng-cd-292303-e7-16308319.pdf?src-supplier=Future+Electronics, ComponentLink7URL=https://datasheet.ciiva.com/16308/eng-cd-292303-e7-16308319.pdf?src-supplier=Future+Electronics, ComponentLink8Description=https://datasheet.ciiva.com/3094/eng-ds-1-1773453-6-0908-3094357.pdf?src-supplier=Avnet, ComponentLink8URL=https://datasheet.ciiva.com/3094/eng-ds-1-1773453-6-0908-3094357.pdf?src-supplier=Avnet, ComponentLink9Description=https://datasheet.ciiva.com/16468/eng-ds-1-1773453-6-0908-16468232.pdf?src-supplier=Avnet+Asia, ComponentLink9URL=https://datasheet.ciiva.com/16468/eng-ds-1-1773453-6-0908-16468232.pdf?src-supplier=Avnet+Asia, ComponentLink10Description=https://datasheet.ciiva.com/851/eng-cd-292303-e9-851082.pdf?src-supplier=Digi-Key, ComponentLink10URL=https://datasheet.ciiva.com/851/eng-cd-292303-e9-851082.pdf?src-supplier=Digi-Key, ComponentLink11Description=https://datasheet.ciiva.com/8016/1653030-8016986.pdf?src-supplier=Element14, ComponentLink11URL=https://datasheet.ciiva.com/8016/1653030-8016986.pdf?src-supplier=Element14, ComponentLink12Description=https://datasheet.ciiva.com/14618/70041246-14618698.pdf?src-supplier=Allied+Electronics, ComponentLink12URL=https://datasheet.ciiva.com/14618/70041246-14618698.pdf?src-supplier=Allied+Electronics, ComponentLink13Description=https://datasheet.ciiva.com/25907/eng-ds-1-1773453-6-0908-25907515.pdf?src-supplier=Avnet+Europe, ComponentLink13URL=https://datasheet.ciiva.com/25907/eng-ds-1-1773453-6-0908-25907515.pdf?src-supplier=Avnet+Europe, ComponentLink14Description=https://datasheet.ciiva.com/30148/ddecontrolleractionsrchrtrvdocnm117734536doctypedsdoclan-30148862.pdf?src-supplier=Onlinecomponents.com, ComponentLink14URL=https://datasheet.ciiva.com/30148/ddecontrolleractionsrchrtrvdocnm117734536doctypedsdoclan-30148862.pdf?src-supplier=Onlinecomponents.com, Connector System=Cable-to-Board, Connector Type=Receptacle, Contact Material="Copper Alloy,Copper", Contact Plating=Gold, Current Rating=1A, Depth=14mm, Gender=Receptacle, Halogen Free="Halogen Free", Housing Color=Black, Housing Material=Thermoplastic, Length=14.63mm, Mount="Through Hole,Horizontal", Number of Contacts=4, Number of Ports=1, Number of Positions=4, Number of Terminals=4, Orientation="Right Angle", Packaging=Rail/Tube, PCB Thickness=0.062inch, Pitch=2.5mm, Plating=Bright,Tin, Plating Thickness=0.76um, Pricing 1="1=1.49000, 10=1.35400, 25=1.27160, 50=1.21620, 100=1.16100, 250=1.05040, 500=0.96748, 1000=0.82926, 2500=0.77398 (USD)", REACH SVHC="No SVHC", RoHS=Yes, Stock 1=16277, Supplier 1=Digi-Key, Tail Length=0.112inch, Termination="Through Hole", USB Standard="USB 2.0"
Relay1: ComponentLink1Description="datasheed_be_aware of pin", ComponentLink1URL=https://omronfs.omron.com/en_US/ecb/products/pdf/en-g5v_1.pdf

## Via types
v1: diameter 50, hole 28, Top Layer to Bottom Layer, 80 vias
v2: diameter 78.74, hole 47.24, Top Layer to Bottom Layer, 3 vias

## Nets (pads, with @x,y where several pads share a name; then routed paths per layer and width w, separated by ;. In a path a pad name is that pad's centre, name@x,y a point inside that pad or via, vN(x,y) a via of type N, cw(c..) or ccw(c..) an arc to the next point about the centre after c; other vN are vias at no path point)
2: esp1.19 j6.1 | length 2582.8
  Top Layer w18: esp1.19 1188.98,1460.63 1320,1329.61 v1(1320,100)
  Bottom Layer w18: j6.1 v1(1320,100)
5: esp1.12 j6.2 | length 2938.8
  Top Layer w18: v1(1100,200) 1100,2087.4 1173.23,2160.63 esp1.12
  Bottom Layer w18: j6.2 v1(1100,200)
12: esp1.33 j6.3 | length 2839.2
  Top Layer w18: v1(760,300) v1(760,2060)
  Bottom Layer w18: j6.3 v1(760,300) ; esp1.33 281.42,2060.31 759.69,2060.31 v1(760,2060)
13: esp1.34 j6.4 | length 2479.2
  Top Layer w18: v1(680,400) v1(680,1960)
  Bottom Layer w18: j6.4 v1(680,400) ; esp1.34 679.37,1960.63 v1(680,1960)
15: esp1.20 j6.5 | length 1965
  Top Layer w18: esp1.20 1240,1301.73 v1(1240,500)
  Bottom Layer w18: j6.5 v1(1240,500)
19: esp1.9 j6.6 | length 2792
  Top Layer w18: v1(1020,600) 1020,2307.4 1173.23,2460.63 esp1.9
  Bottom Layer w18: j6.6 v1(1020,600)
21: esp1.6 j6.7 | length 3057.9
  Top Layer w18: v1(960,700) 970,710 970,2730 v1(980,2740)
  Bottom Layer w18: j6.7 v1(960,700) ; v1(980,2740) 990.82,2740 1011.45,2760.63 esp1.6
22: esp1.5 j6.8 | length 3083.8
  Top Layer w18: v1(820,790) v1(820,2850)
  Bottom Layer w10: v1(820,2850) v1@840.31,2860.31 ; esp1.5@1180.79,2860.31 esp1.5
  Bottom Layer w18: j6.8 v1(820,790) ; v1@840.31,2860.31 esp1.5@1180.79,2860.31
+5V: C1.2 C2.2 C3.2 D2.2 J1.3 J1.4 J2.2 J3.2 J4.1 J5.1 Relay1.1 Relay1.5 | length 6727.1
  Top Layer w40: D2.2 3163.64,549.53 3190.33,576.22 3286.14,576.22 J1.3
  Bottom Layer w40: 2320,1000 2800,1000 3200,1000 3536.57,1000 3590,1000
  Bottom Layer w50: Relay1.1 Relay1.5 2320,1000 ; C3.2 2800,1177.01 2800,1000 ; J3.2 J2.2 3615.64,1771.65 3627.29,1760 3660,1760 ; 3200,1000 3209.21,1009.21 C2.2 ; C1.2 3590,1174.41 3590,1000 ; 3660,956.57 3670,946.57
  Bottom Layer w60: J5.1 J4.1
  Bottom Layer w100: J4.1 3690,2559.06 3690,1822.71 3627.29,1760 ; 3530.55,590.55 3527.4,587.4 J1.4 J1.3 3394.72,490 3561.42,490 3620,548.58 3620,600 3580,640 3670,730 3670,946.57 ; 3536.57,1000 3658.28,878.28 ; 3660,956.57 3660,1760
Butt_A: esp1.25 J4.2 | length 6112.2
  Top Layer w15: v1(1700,1260) 1750,1310 v1(1750,2430)
  Top Layer w20: esp1.25 449.37,2860.63 490,2820 v1(490,1280) ; v1(3132.52,2432.52) v1(3132.52,2657.48)
  Bottom Layer w15: v1(490,1280) 499.47,1280 539.47,1240 1680,1240 v1(1700,1260)
  Bottom Layer w20: v1(1750,2430) 3130,2430 v1(3132.52,2432.52) ; v1(3132.52,2657.48) J4.2
Butt_B: esp1.26 J5.2 | length 5527.6
  Top Layer w15: v1(1757.48,1181.72) 1800,1244.24 1800,1840 1820,1860 1820,2600 v1(1840,2620)
  Top Layer w20: esp1.26 281.73,2760 408.28,2760 420,2748.28 v1(420,1200)
  Bottom Layer w15: v1@420,1181.72 v1(1757.48,1181.72)
  Bottom Layer w20: v1(1840,2620) 2816.85,2620 J5.2
DTR_IO0: cp1.28 esp1.17 | length 1951.6
  Top Layer w10: cp1.28 2006.89,589.57
  Top Layer w15: 2006.89,589.57 2020,602.68
  Top Layer w20: v1(2000,1640) 2020,1620 2020,602.68
  Bottom Layer w20: esp1.17 1971.25,1660.63 1991.88,1640 v1(2000,1640)
En_A_CLK: esp1.29 J2.5 | length 6111.2
  Top Layer w15: v1(200,1155) 120,1235 120,2307.4 273.23,2460.63 esp1.29
  Top Layer w20: v1(1900,1080) 1900,2220 1920,2240 v1(1900,2260) ; J2.5 v1(3444.88,2275.12)
  Bottom Layer w15: v1(200,1155) 275,1080 1890,1080 1900,1090 v1(1900,1080)
  Bottom Layer w20: v1(1900,2260) 3429.76,2260 v1(3444.88,2275.12)
En_A_CS: esp1.30 J2.4 | length 5317.5
  Top Layer w15: esp1.30 273.23,2360.63 160,2247.4 160,1320 340,1140 v1(340,1122.5)
  Top Layer w20: v1(1850,1122.5) v1(1850,1580) ; v1(3070,1580) 3070,1967.01 v1(3071.5,1968.5)
  Bottom Layer w15: v1(340,1122.5) v1@1847.5,1122.5
  Bottom Layer w20: v1@1847.5,1122.5 v1(1850,1122.5) ; v1(1850,1580) v1(3070,1580) ; v1(3071.5,1968.5) J2.4
En_A_D0: esp1.28 J2.1 | length 5561.5
  Top Layer w15: v1(200,1060) 173.66,1062.93 80,1180 80,2367.4 273.23,2560.63 esp1.28
  Top Layer w20: v1(1950,1370) 1960,1360 v1(1960,1040) ; v1(3180,1370) v1(3180,1670)
  Bottom Layer w15: v1(200,1060) 240,1020 1940,1020 v1(1960,1040)
  Bottom Layer w20: v1(1950,1370) v1(3180,1370) ; v1(3180,1670) 3181.61,1671.61 3440.04,1671.61 3441.65,1670 J2.1
En_B_CLK: esp1.15 J3.5 | length 1869.3
  Top Layer w20: v1(1426.93,1853.07) v1(1426.93,2026.93)
  Bottom Layer w20: esp1.15 1184.88,1856.85 1423.15,1856.85 v1(1426.93,1853.07) ; v1(1426.93,2026.93) 2660,2020.88 2740.88,2020.88 2786.93,2066.93 J3.5
En_B_CS: esp1.14 J3.4 | length 1676.5
  Bottom Layer w20: esp1.14 1185.04,1964.57 2850.39,1964.57 J3.4
En_B_D0: esp1.16 J3.1 | length 1709.4
  Bottom Layer w20: esp1.16 2729.37,1760.63 2816.77,1673.23 J3.1
Esp32_Power: C8.14 esp1.35 Relay1.3 | length 7164.5
  Top Layer w15: C8.14 v1@1350,2760.53
  Top Layer w30: v2(560,3600) v2@580,3580
  Top Layer w50: v2(580,1860) v2@580,3580 ; v2(2250,3590) v1(2250,2750) 2250,1470 Relay1.3@2450,1470
  Bottom Layer w30: esp1.35 281.73,1860 v2(580,1860) ; v1(1340,2780) 2100,2780 2130,2750 v1(2250,2750)
  Bottom Layer w50: v2(560,3600) 570,3590 v2(2250,3590)
Gate_Data_to_Inner: C8.6 J5.4 | length 3053.8
  Top Layer w15: v1(1280,2100) 1280,2840 v1(1300,2860) ; C8.6 1600,2320 1680,2240 v1(1680,2080)
  Bottom Layer w15: v1(1280,2100) 1300,2080 v1(1680,2080) ; v1(1300,2860) 2848.66,2860 J5.4
Gate_Data_to_Outter: C8.3 J4.4 | length 3070.4
  Top Layer w15: v1(1440,2240) 1440,2249.47 1450,2259.47 C8.3 ; v1(3570,2190) v1(3570,2850)
  Bottom Layer w15: v1(1440,2240) 1490,2190 v1(3570,2190) ; J4.4 3447.05,2852.17 3570,2852.17 v1(3570,2850)
Gate_Inner: C8.5 esp1.11 | length 717
  Top Layer w15: C8.5 1550,2310 1600,2260 v1(1600,2140)
  Bottom Layer w15: esp1.11 1188.98,2260.63 1249.61,2200 v1(1340,2200) 1400,2140 v1(1600,2140)
Gate_Outter: C8.2 esp1.10 | length 334.6
  Top Layer w15: v1(1340,2280) 1391.21,2280 1400,2288.79 C8.2
  Bottom Layer w15: esp1.10 1188.98,2360.63 1269.61,2280 v1(1340,2280)
GND: C1.1 C2.1 C3.1 C4.1 C5.1 C6.1 C7.1 C8.7 cp1.3 cp1.29 D5.1 J1.1 J1.2 J2.3 J3.3 J4.3 J5.3 R1.1 R2.1 R6.1 Relay1.2 usb1.1 | length 5823.9
  Top Layer w10: v1(1908.64,480) 1936.83,451.81 cp1.3 2008.19,451.81 cp1.29@2020,440
  Top Layer w15: v1(1380,860) v1(1380,400) 1380,250 1528.39,101.61 1689.84,101.61 1740.98,50.47 C7.1 C6.1 ; v1(1520,390) 1520.24,390.24 1639.76,390.24 C4.1 C5.1 ; D5.1 1863.07,573.07 1890,600 v1(1890,640) v1(1890,860) ; v1(2790,850) v1@2793.58,846.42 ; usb1.1@2793.58,643.58 usb1.1
  Top Layer w30: usb1.1@2793.58,643.58 v1@2793.58,846.42
  Bottom Layer w10: v1(1890,640) 1890,498.64 v1(1908.64,480)
  Bottom Layer w15: v1(1380,400) 1390,390 v1(1520,390) ; J3.3 J2.3 ; J5.3 J4.3
  Bottom Layer w30: v1(1380,860) v1(1890,860) 2781.21,860 2790,851.21 v1(2790,850) ; 3248.03,807.09 3413.39,807.09
  Bottom Layer w50: v1(2790,850) 2832.91,807.09 3248.03,807.09
Neopixel_Data: C8.1 C8.4 esp1.31 | length 3541.8
  Top Layer w15: v1(240,1460) 240,1468.12 200,1508.12 200,2187.4 273.23,2260.63 esp1.31
  Top Layer w20: C8.1 1350,2385.12 1404.88,2440 1494.14,2440 1500,2434.14 C8.4 1500,2280 1520,2260 v1(1520,1320)
  Bottom Layer w20: v1(240,1460) 699.19,1460 879.19,1280 1480,1280 v1(1520,1320)
NetC6_2: C6.2 C7.2 cp1.6 R7.1 | length 560.3
  Top Layer w10: v1(1910,330) 1910,356.14 1946.61,392.76 cp1.6
  Top Layer w15: v1(1920,170) C7.2 C6.2 2043.94,109.53 2074.41,140 R7.1 R7.1@2143.23,140
  Bottom Layer w15: v1(1910,330) 1910,180 v1(1920,170)
Netcp1_4: cp1.4 D5.2 usb1.2 | length 1662.3
  Top Layer w10: D5.2 1812.13,640 1775,602.87 1775,535 1840,470 1840,440 1847.87,432.13 1860,432.13 ; v1(1960,780) 1960,610 1860,510 1860,432.13 ; cp1.4 1860,432.13
  Top Layer w20: usb1.2 v1(2698.74,788.74)
  Bottom Layer w15: v1(1960,780) 1962.5,782.5 2692.5,782.5 v1(2698.74,788.74)
Netcp1_5: cp1.5 D5.3 usb1.3 | length 2108.7
  Top Layer w10: D5.3 1733.39,506.61 1750,490 1780,490 1810,460 1810,430 1827.56,412.44 1921.75,412.44 ; v1(1820,350) 1859.31,350 1921.75,412.44 ; cp1.5 1921.75,412.44
  Top Layer w15: v1(2260,390) v1(2260,730) ; usb1.3 v1(2620,740)
  Bottom Layer w15: v1(1820,350) 1820,100 1840,80 1950,80 v1(2260,390) ; v1(2260,730) 2270,740 v1(2620,740)
Netcp1_8: cp1.8 R5.1 R6.2 | length 476.5
  Top Layer w10: 1900,240 1971.77,240 2006.89,275.12 cp1.8
  Top Layer w15: R6.2 1740,178.39 1761.61,200 1860,200 1900,240
Netcp1_9: cp1.9 R7.2 | length 321.4
  Top Layer w10: cp1.9 2027.48,333.78 2027.48,311.89 2099.37,240 2180,240 2218.39,201.61 R7.2
NetD1_1: D1.1 R1.2 | length 141.6
  Top Layer w20: D1.1@1300,3400 R1.2
NetD1_2: D1.2 esp1.4 | length 751.7
  Top Layer w20: esp1.4 1173.23,2960.63 1000.94,3132.91 1000.94,3329.23 1012.66,3340.94 D1.2@1300,3340.94
NetD2_1: D2.1 R2.2 | length 120.4
  Top Layer w20: R2.2 3120,470.47 D2.1
NetD3_1: D3.1 R4.2 | length 196.9
  Top Layer w30: D3.1 R4.2
NetD4_1: D4.1 R3.2 | length 196.9
  Top Layer w30: D4.1 R3.2
Netesp1_1: esp1.1 esp1.7 esp1.8 esp1.18 esp1.36 R3.1 R4.1 | length 4206.4
  Top Layer w20: esp1.1 1320.63,3260.63 1400,3340 1569.45,3340 1750,3159.45 R4.1
  Top Layer w30: v1(900,1560.63) v1@900,2660 ; v1(900,3260) v1@900,2660 ; v1(900.63,2660.63) v1@900,2660 ; R3.1 R4.1
  Bottom Layer w30: esp1.36 288.98,1760.63 488.98,1560.63 v1(900,1560.63) esp1.18 ; v1@900,3260.63 esp1.1 ; v1(900.63,2660.63) esp1.7 esp1.8
RTS_EN: cp1.24 esp1.22 | length 5009.8
  Top Layer w10: cp1.24 2085.63,551.46 2160,625.83
  Top Layer w15: v1(50,3160) 40,3150 40,1040 v1(60,1020) ; 2160,625.83 2180,645.83 v1(2180,980)
  Bottom Layer w15: v1(50,3160) 60.31,3160.31 280.79,3160.31 esp1.22 ; v1(60,1020) 100,980 v1(2180,980)
RX: cp1.26 D4.2 esp1.3 | length 3374.8
  Top Layer w10: cp1.26 2046.26,629.57 2062.5,645.81 2062.5,653.33
  Top Layer w15: esp1.3 1331.02,3060.63 D4.2 1406.26,2963.27 1420,2949.53 v1(1420,2680) ; v1(2060,2680) v1@2062.5,2677.5
  Top Layer w20: 2062.5,653.33 v1@2062.5,2677.5
  Bottom Layer w15: v1(1420,2680) v1(2060,2680)
TX: cp1.25 D3.2 esp1.2 | length 3791.2
  Top Layer w10: cp1.25 2065.94,585.94 2120,640
  Top Layer w15: esp1.2 1406.3,3160.63 D3.2 v1(1417.32,3257.32) ; v1(2117.5,3242.5) v1@2120,3240
  Top Layer w20: 2120,640 v1@2120,3240
  Bottom Layer w15: v1(1417.32,3257.32) 2097.32,3257.32 2112.15,3242.5 v1(2117.5,3242.5)
USB_5V: C4.2 C5.2 cp1.7 D5.4 R5.2 Relay1.4 usb1.4 | length 3399.8
  Top Layer w10: 1840,278.39 1948.39,278.39 1968.5,298.5 cp1.7
  Top Layer w20: v1(1450,930) v1(1450,660) ; D5.4 1713.39,660 v1(1450,660) ; C5.2 C4.2 1560.47,449.53 1530,480 v1(1450,480) ; 1840,278.39 1839.19,279.19 1520.81,279.19 v1(1450,280) v1(1450,480) ; v1(1450,480) v1(1450,660)
  Top Layer w30: Relay1.4 2520,1000 v1(2520,920) 2520,641.57 usb1.4
  Bottom Layer w20: v1(1450,930) 1460,920 v1(2520,920)
pads on no net: C8.8 C8.9 C8.10 C8.11 C8.12 C8.13 cp1.1 cp1.2 cp1.10 cp1.11 cp1.12 cp1.13 cp1.14 cp1.15 cp1.16 cp1.17 cp1.18 cp1.19 cp1.20 cp1.21 cp1.22 cp1.23 cp1.27 esp1.13 esp1.21 esp1.23 esp1.24 esp1.27 esp1.32 J1.88 usb1.5 usb1.8

## Polygon pours and split planes (outlines as drawn)
GND on Top Layer (solid, pour order 10): 0,3740.16 3740.16,3740.16 3740.16,0 0,0

## Other copper
Bottom Layer:
  rectangle net GND: 2880,740 3510,860
  rectangle net +5V: 3240,440 3720,650

## Text inside footprints (layer, text, board x,y; h text height)
cp1: Top Overlay "o" at 1920,520 h39.37; Top Overlay "CP2102" at 1955.94,572.13 h59.06
D5: Top Overlay "Sp0503" at 1640,700 h59.06
esp1: Top Overlay "GND" at 403.54,1754.72 h80; Top Overlay "5V" at 403.54,1862.99 h80; Top Overlay "1" at 1013.78,3240.94 h80
J2: Top Overlay "VCC" at 3204.88,1746.93 h47.24; Top Overlay "CLK" at 3188.98,2047.24 h47.24; Top Overlay "CS" at 3228.35,1948.82 h47.24; Top Overlay "D0" at 3228.35,1653.54 h47.24; Top Overlay "GND" at 3204.88,1846.93 h47.24
J3: Top Overlay "GND" at 2614.33,1846.93 h47.24; Top Overlay "D0" at 2637.8,1653.54 h47.24; Top Overlay "CS" at 2637.8,1948.82 h47.24; Top Overlay "CLK" at 2598.43,2047.24 h47.24; Top Overlay "VCC" at 2614.33,1746.93 h47.24
J4: Top Overlay "GND" at 3194.88,2729.06 h47.24; Top Overlay "5V" at 3228.35,2539.37 h47.24; Top Overlay "LED_IN" at 3144.88,2839.06 h47.24; Top Overlay "Butt" at 3204.88,2632.76 h47.24
J5: Top Overlay "Butt" at 2614.33,2632.76 h47.24; Top Overlay "LED_IN" at 2554.33,2839.06 h47.24; Top Overlay "5V" at 2637.8,2539.37 h47.24; Top Overlay "GND" at 2604.33,2729.06 h47.24
j6: Top Overlay "2" at 340,120 h78.74 r180; Top Overlay "22" at 340,820 h78.74 r180; Top Overlay "21" at 340,720 h78.74 r180; Top Overlay "19" at 340,620 h78.74 r180; Top Overlay "15" at 340,520 h78.74 r180; Top Overlay "13" at 340,420 h78.74 r180; Top Overlay "12" at 340,320 h78.74 r180; Top Overlay "5" at 340,220 h78.74 r180; Top Overlay "1" at 90,110 h39.37 r180
Relay1: Top Overlay "G5V-1" at 2435,1335 h59.06 r180
usb1: Top Overlay "GND" at 2787.32,817.17 h47.24 r270